# Altium PCB 驱动1.PcbDoc (part 2 of 2)
Units mil, origin at the board's own origin, x right, y up, seen from the top; angles counter-clockwise.
Board outline 2623.25 x 1935.03 mil, 2 copper layers (Top Layer, Bottom Layer); 38 components, 27 nets, 123 pads, 99 vias.
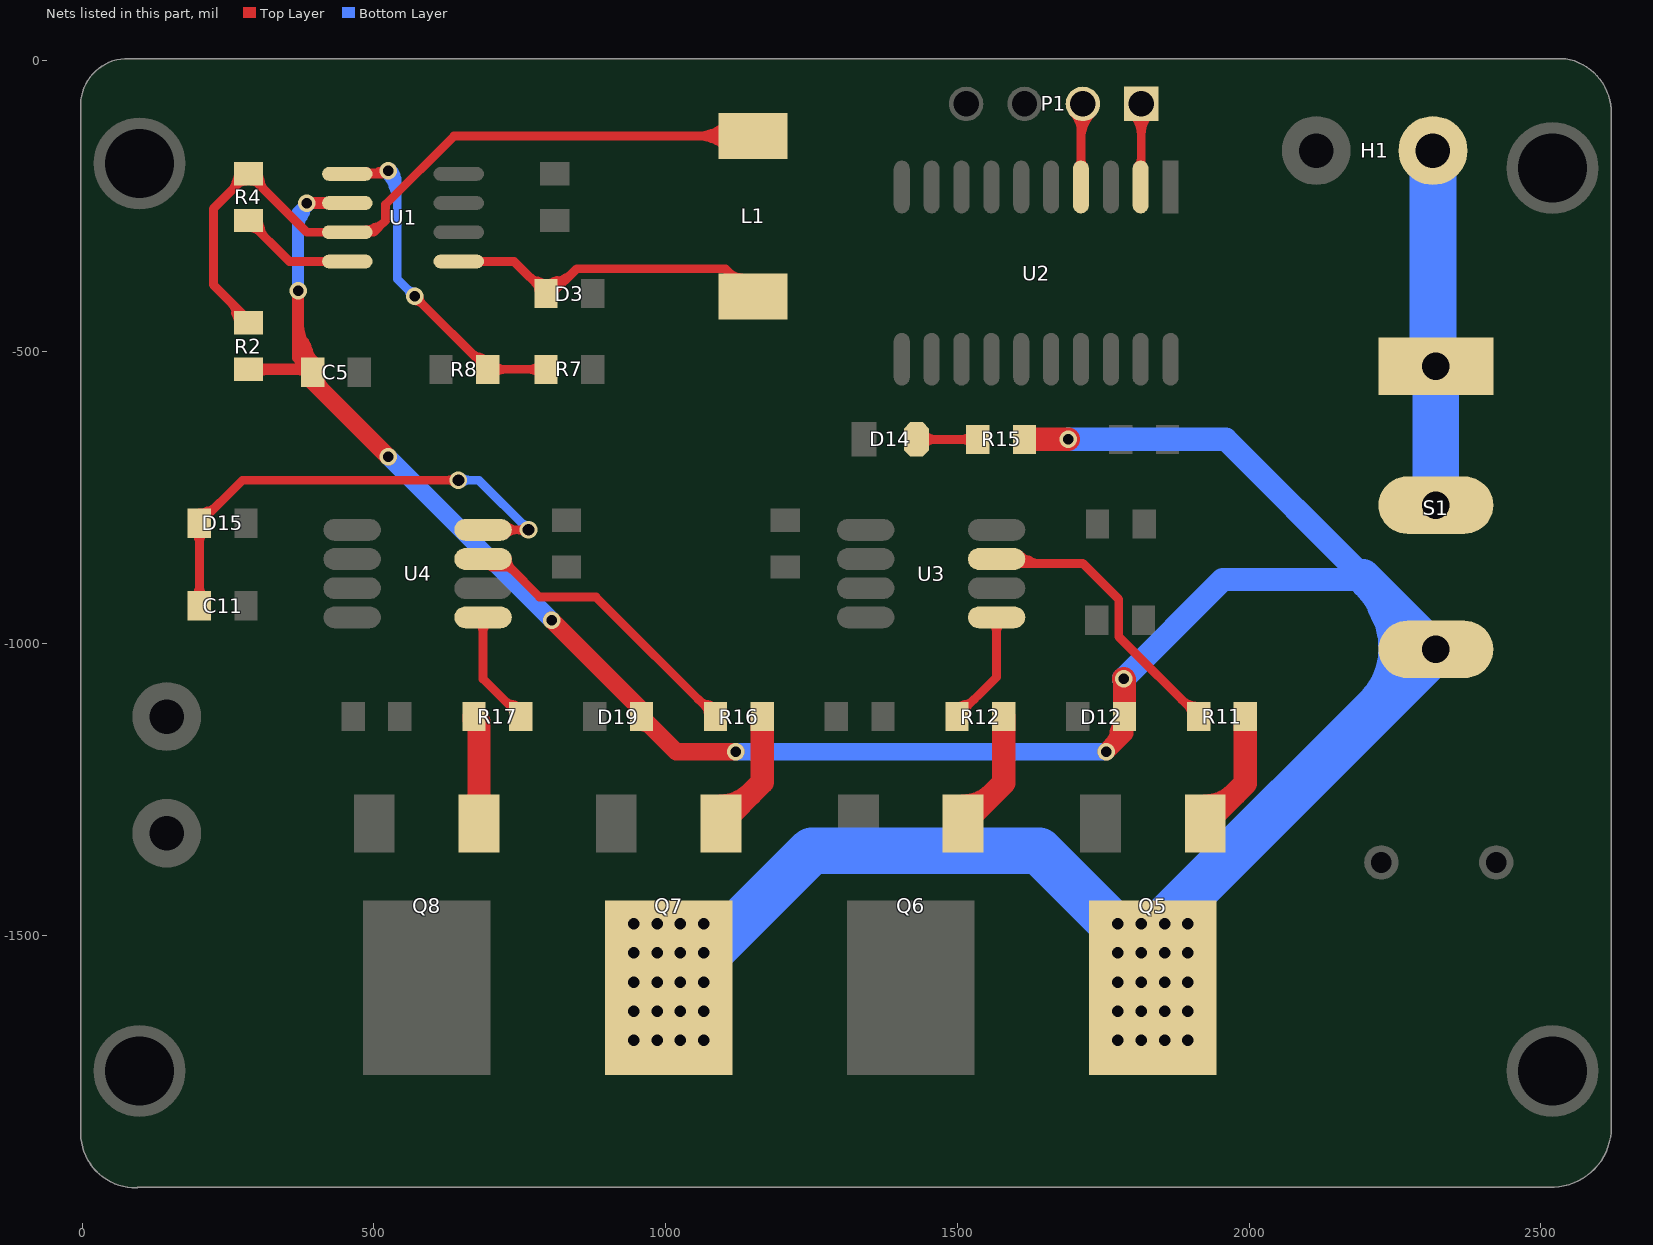
[diagram p2: the nets of this part, all layers, seen from the top]

## Via types
v1: diameter 31.5, hole 19.68, Top Layer to Bottom Layer, 80 vias
v2: diameter 30, hole 18, Top Layer to Bottom Layer, 17 vias
v3: diameter 30, hole 20, Top Layer to Bottom Layer, 2 vias

## Nets (pads, with @x,y where several pads share a name; then routed paths per layer and width w, separated by ;. In a path a pad name is that pad's centre, name@x,y a point inside that pad or via, vN(x,y) a via of type N, cw(c..) or ccw(c..) an arc to the next point about the centre after c; other vN are vias at no path point) (continued)
NetC11_1: C11.1 D15.1 U4.8 | length 1824.4
  Top Layer w15: C11.1@200.99,-935 D15.1@200.99,-793.8 274.79,-720 v3(645,-720) ; U4.8@687.2,-805 v3(765,-805) ; C11.1@192.15,-921.16 ccw(c170.81,-899.82) 200.99,-899.82 ; C11.1@192.15,-921.16 ccw(c170.81,-899.82) 200.99,-899.82 ; C11.1@192.15,-921.16 ccw(c170.81,-899.82) 200.99,-899.82 ; D15.1@192.15,-807.64 cw(c170.81,-828.98) 200.99,-828.98 ; D15.1@192.15,-807.64 cw(c170.81,-828.98) 200.99,-828.98 ; D15.1@192.15,-807.64 cw(c170.81,-828.98) 200.99,-828.98 ; D15.1@198.62,-788 cw(c221.41,-795.75) D15.1@215.18,-772.5 ; D15.1@198.62,-788 cw(c221.41,-795.75) D15.1@215.18,-772.5 ; D15.1@198.62,-788 cw(c221.41,-795.75) D15.1@215.18,-772.5 ; D15.1@198.62,-788 cw(c221.41,-795.75) D15.1@215.18,-772.5 ; 200.99,-899.82 ccw(c231.17,-899.82) C11.1@209.83,-921.16 ; 200.99,-899.82 ccw(c231.17,-899.82) C11.1@209.83,-921.16 ; 200.99,-899.82 ccw(c231.17,-899.82) C11.1@209.83,-921.16 ; 200.99,-828.98 cw(c231.17,-828.98) D15.1@209.83,-807.64 ; 200.99,-828.98 cw(c231.17,-828.98) D15.1@209.83,-807.64 ; 200.99,-828.98 cw(c231.17,-828.98) D15.1@209.83,-807.64 ; D15.1@200.99,-776.3 ccw(c200.99,-734.05) 230.86,-763.93 ; D15.1@200.99,-776.3 ccw(c200.99,-734.05) 230.86,-763.93 ; D15.1@200.99,-776.3 ccw(c200.99,-734.05) 230.86,-763.93 ; D15.1@213.49,-788.8 cw(c231.6,-788.8) D15.1@218.79,-776 ; D15.1@213.49,-788.8 cw(c231.6,-788.8) D15.1@218.79,-776 ; D15.1@213.49,-788.8 cw(c231.6,-788.8) D15.1@218.79,-776 ; 626.89,-720 cw(c626.89,-738.11) v3@639.7,-725.3 ; 626.89,-720 ccw(c626.89,-701.89) v3@639.7,-714.7 ; 626.89,-720 cw(c626.89,-738.11) v3@639.7,-725.3 ; 626.89,-720 ccw(c626.89,-701.89) v3@639.7,-714.7 ; 626.89,-720 cw(c626.89,-738.11) v3@639.7,-725.3 ; 626.89,-720 ccw(c626.89,-701.89) v3@639.7,-714.7 ; U4.8@725.64,-812.92 cw(c744.76,-832.04) 744.76,-805 ; U4.8@725.64,-812.92 cw(c744.76,-832.04) 744.76,-805 ; U4.8@725.64,-812.92 cw(c744.76,-832.04) 744.76,-805 ; U4.8@725.64,-797.08 ccw(c744.76,-777.96) 744.76,-805 ; U4.8@725.64,-797.08 ccw(c744.76,-777.96) 744.76,-805 ; U4.8@725.64,-797.08 ccw(c744.76,-777.96) 744.76,-805 ; 746.89,-805 cw(c746.89,-823.11) 759.7,-810.3 ccw(c746.89,-823.11) 746.89,-805 ; 746.89,-805 ccw(c746.89,-786.89) v3@759.7,-799.7 ; 746.89,-805 ccw(c746.89,-786.89) v3@759.7,-799.7 ; 746.89,-805 ccw(c746.89,-786.89) v3@759.7,-799.7
  Bottom Layer w15: v3(645,-720) 680,-720 v3(765,-805) ; v3@650.3,-725.3 cw(c663.11,-738.11) 663.11,-720 ; v3@650.3,-725.3 cw(c663.11,-738.11) 663.11,-720 ; v3@650.3,-725.3 cw(c663.11,-738.11) 663.11,-720 ; v3@650.3,-714.7 ccw(c663.11,-701.89) 663.11,-720 ; v3@650.3,-714.7 ccw(c663.11,-701.89) 663.11,-720 ; v3@650.3,-714.7 ccw(c663.11,-701.89) 663.11,-720 ; 752.2,-792.2 cw(c739.39,-805) v3@757.5,-805 ; 752.2,-792.2 ccw(c765,-779.39) v3@765,-797.5 ; 752.2,-792.2 cw(c739.39,-805) v3@757.5,-805 ; 752.2,-792.2 ccw(c765,-779.39) v3@765,-797.5 ; 752.2,-792.2 cw(c739.39,-805) v3@757.5,-805 ; 752.2,-792.2 ccw(c765,-779.39) v3@765,-797.5
NetD3_2: D3.2 L1.2 U1.1 | length 1304.6
  Top Layer w15: U1.1@645.47,-345 740,-345 D3.2@795,-400 805.25,-400 847.75,-357.5 1102.5,-357.5 ; L1.2@1150,-405 1102.5,-357.5 ; 765.13,-370.13 ccw(c795,-340.25) D3.2@795,-382.5 ; 765.13,-370.13 ccw(c795,-340.25) D3.2@795,-382.5 ; 765.13,-370.13 ccw(c795,-340.25) D3.2@795,-382.5 ; D3.2@777.2,-382.2 cw(c764.39,-395) D3.2@782.5,-395 ; D3.2@777.2,-382.2 cw(c764.39,-395) D3.2@782.5,-395 ; D3.2@777.2,-382.2 cw(c764.39,-395) D3.2@782.5,-395 ; D3.2@780.81,-378.7 cw(c774.58,-401.95) D3.2@797.37,-394.19 ; D3.2@780.81,-378.7 cw(c774.58,-401.95) D3.2@797.37,-394.19 ; D3.2@780.81,-378.7 cw(c774.58,-401.95) D3.2@797.37,-394.19 ; D3.2@780.81,-378.7 cw(c774.58,-401.95) D3.2@797.37,-394.19 ; D3.2@792.83,-393.76 cw(c823,-410.94) D3.2@814.01,-377.41 ; D3.2@792.83,-393.76 cw(c823,-410.94) D3.2@814.01,-377.41 ; D3.2@792.83,-393.76 cw(c823,-410.94) D3.2@814.01,-377.41 ; D3.2@792.83,-393.76 cw(c823,-410.94) D3.2@814.01,-377.41 ; D3.2@795,-397.5 ccw(c795,-366.72) 816.77,-388.48 ; D3.2@795,-397.5 ccw(c795,-366.72) 816.77,-388.48 ; D3.2@795,-397.5 ccw(c795,-366.72) 816.77,-388.48 ; D3.2@795,-382.5 ccw(c795,-315.5) 842.37,-362.88 ; D3.2@795,-382.5 ccw(c795,-315.5) 842.37,-362.88 ; D3.2@795,-382.5 ccw(c795,-315.5) 842.37,-362.88 ; 1102.5,-357.5 cw(c1086.95,-373.05) L1.2@1104.66,-386.1 ; 1102.5,-357.5 cw(c1086.95,-373.05) L1.2@1104.66,-386.1 ; 1102.5,-357.5 cw(c1086.95,-373.05) L1.2@1104.66,-386.1 ; 1109.51,-364.51 ccw(c1130.32,-343.71) L1.2@1130.32,-373.13 ; 1109.51,-364.51 ccw(c1130.32,-343.71) L1.2@1130.32,-373.13 ; 1109.51,-364.51 ccw(c1130.32,-343.71) L1.2@1130.32,-373.13
NetD14_1: D14.1 R15.2 | length 711.5
  Top Layer w15: D14.1@1430,-650 R15.2@1535,-650 ; D14.1@1440.01,-660.01 cw(c1464.17,-684.17) 1464.17,-650 ; D14.1@1440.01,-660.01 cw(c1464.17,-684.17) 1464.17,-650 ; D14.1@1440.01,-660.01 cw(c1464.17,-684.17) 1464.17,-650 ; D14.1@1440.01,-660.01 cw(c1464.17,-684.17) 1464.17,-650 ; D14.1@1440.01,-660.01 cw(c1464.17,-684.17) 1464.17,-650 ; D14.1@1440.01,-660.01 cw(c1464.17,-684.17) 1464.17,-650 ; D14.1@1440.01,-639.99 ccw(c1464.17,-615.83) 1464.17,-650 ; D14.1@1440.01,-639.99 ccw(c1464.17,-615.83) 1464.17,-650 ; D14.1@1440.01,-639.99 ccw(c1464.17,-615.83) 1464.17,-650 ; D14.1@1440.01,-639.99 ccw(c1464.17,-615.83) 1464.17,-650 ; D14.1@1440.01,-639.99 ccw(c1464.17,-615.83) 1464.17,-650 ; D14.1@1440.01,-639.99 ccw(c1464.17,-615.83) 1464.17,-650 ; 1504.82,-650 cw(c1504.82,-680.18) R15.2@1526.16,-658.84 ; 1504.82,-650 cw(c1504.82,-680.18) R15.2@1526.16,-658.84 ; 1504.82,-650 cw(c1504.82,-680.18) R15.2@1526.16,-658.84 ; 1504.82,-650 cw(c1504.82,-680.18) R15.2@1526.16,-658.84 ; 1504.82,-650 cw(c1504.82,-680.18) R15.2@1526.16,-658.84 ; 1504.82,-650 cw(c1504.82,-680.18) R15.2@1526.16,-658.84 ; 1504.82,-650 ccw(c1504.82,-619.82) R15.2@1526.16,-641.16 ; 1504.82,-650 ccw(c1504.82,-619.82) R15.2@1526.16,-641.16 ; 1504.82,-650 ccw(c1504.82,-619.82) R15.2@1526.16,-641.16 ; 1504.82,-650 ccw(c1504.82,-619.82) R15.2@1526.16,-641.16 ; 1504.82,-650 ccw(c1504.82,-619.82) R15.2@1526.16,-641.16 ; 1504.82,-650 ccw(c1504.82,-619.82) R15.2@1526.16,-641.16
NetH1_2: H1.2 S1.1 S1.2 | length 609.8
  Bottom Layer w80: H1.2@2315,-155 2315,-520 S1.1@2320,-525 S1.2@2320,-762.76
NetL1_1: L1.1 R2.1 R4.2 U1.7 | length 2784
  Top Layer w15: R2.1@285,-450 285,-445 225,-385 225,-255 R4.2@285,-195 385,-295 U1.7@454.53,-295 500,-295 520,-275 520,-247.52 637.52,-130 L1.1@1150,-130 ; 251.59,-411.59 cw(c213.18,-450) R2.1@267.5,-450 ; 251.59,-411.59 cw(c213.18,-450) R2.1@267.5,-450 ; 251.59,-411.59 cw(c213.18,-450) R2.1@267.5,-450 ; 255.13,-224.87 ccw(c225.25,-195) R4.2@267.5,-195 ; 255.13,-224.87 ccw(c225.25,-195) R4.2@267.5,-195 ; 255.13,-224.87 ccw(c225.25,-195) R4.2@267.5,-195 ; R2.1@263.07,-433.46 ccw(c291.02,-425.97) R2.1@278.96,-452.27 ; R2.1@263.07,-433.46 ccw(c291.02,-425.97) R2.1@278.96,-452.27 ; R2.1@263.07,-433.46 ccw(c291.02,-425.97) R2.1@278.96,-452.27 ; R2.1@263.07,-433.46 ccw(c291.02,-425.97) R2.1@278.96,-452.27 ; R4.2@263.7,-209.19 cw(c286.95,-215.42) R4.2@279.19,-192.63 ; R4.2@263.7,-209.19 cw(c286.95,-215.42) R4.2@279.19,-192.63 ; R4.2@263.7,-209.19 cw(c286.95,-215.42) R4.2@279.19,-192.63 ; R4.2@263.7,-209.19 cw(c286.95,-215.42) R4.2@279.19,-192.63 ; R4.2@267.2,-212.8 cw(c280,-225.61) R4.2@280,-207.5 ; R4.2@267.2,-212.8 cw(c280,-225.61) R4.2@280,-207.5 ; R4.2@267.2,-212.8 cw(c280,-225.61) R4.2@280,-207.5 ; R4.2@290,-207.5 cw(c290,-225.61) R4.2@302.8,-212.8 ; R4.2@290,-207.5 cw(c290,-225.61) R4.2@302.8,-212.8 ; R4.2@290,-207.5 cw(c290,-225.61) R4.2@302.8,-212.8 ; R4.2@290.81,-192.63 cw(c283.05,-215.42) R4.2@306.3,-209.19 ; R4.2@290.81,-192.63 cw(c283.05,-215.42) R4.2@306.3,-209.19 ; R4.2@290.81,-192.63 cw(c283.05,-215.42) R4.2@306.3,-209.19 ; R4.2@290.81,-192.63 cw(c283.05,-215.42) R4.2@306.3,-209.19 ; R4.2@302.5,-195 ccw(c344.75,-195) 314.87,-224.87 ; R4.2@302.5,-195 ccw(c344.75,-195) 314.87,-224.87 ; R4.2@302.5,-195 ccw(c344.75,-195) 314.87,-224.87 ; U1.7@486.02,-290.69 ccw(c486.02,-246.54) 517.24,-277.76 ; U1.7@486.02,-290.69 ccw(c486.02,-246.54) 517.24,-277.76 ; U1.7@486.02,-290.69 ccw(c486.02,-246.54) 517.24,-277.76 ; U1.7@487.35,-290.9 ccw(c490.81,-280.18) 498.77,-288.14 ; U1.7@487.35,-290.9 ccw(c490.81,-280.18) 498.77,-288.14 ; U1.7@487.35,-290.9 ccw(c490.81,-280.18) 498.77,-288.14 ; U1.7@487.35,-290.9 ccw(c490.81,-280.18) 498.77,-288.14 ; U1.7@489.76,-297.16 cw(c511.08,-309.47) 504.71,-285.68 ; U1.7@489.76,-297.16 cw(c511.08,-309.47) 504.71,-285.68 ; U1.7@489.76,-297.16 cw(c511.08,-309.47) 504.71,-285.68 ; U1.7@489.76,-297.16 cw(c511.08,-309.47) 504.71,-285.68 ; 1053.37,-130 ccw(c1053.37,-53.06) L1.1@1107.78,-107.46 ; 1053.37,-130 ccw(c1053.37,-53.06) L1.1@1107.78,-107.46 ; 1053.37,-130 ccw(c1053.37,-53.06) L1.1@1107.78,-107.46 ; 1053.37,-130 cw(c1053.37,-206.94) L1.1@1107.78,-152.54 ; 1053.37,-130 cw(c1053.37,-206.94) L1.1@1107.78,-152.54 ; 1053.37,-130 cw(c1053.37,-206.94) L1.1@1107.78,-152.54 ; 1089.59,-130 cw(c1089.59,-170.73) L1.1@1118.39,-141.93 ; 1089.59,-130 ccw(c1089.59,-89.27) L1.1@1118.39,-118.07 ; 1089.59,-130 cw(c1089.59,-170.73) L1.1@1118.39,-141.93 ; 1089.59,-130 ccw(c1089.59,-89.27) L1.1@1118.39,-118.07 ; 1089.59,-130 cw(c1089.59,-170.73) L1.1@1118.39,-141.93 ; 1089.59,-130 ccw(c1089.59,-89.27) L1.1@1118.39,-118.07
NetP1_1: P1.1 U2.2 | length 436
  Top Layer w15: U2.2@1814.13,-217.36 1815,-216.5 P1.1@1815,-75 ; P1.1@1799.42,-90.58 cw(c1761.82,-128.18) 1815,-128.18 ; P1.1@1799.42,-90.58 cw(c1761.82,-128.18) 1815,-128.18 ; P1.1@1799.42,-90.58 cw(c1761.82,-128.18) 1815,-128.18 ; U2.2@1809.69,-181.43 ccw(c1796.88,-168.62) 1815,-168.62 ; U2.2@1809.69,-181.43 ccw(c1796.88,-168.62) 1815,-168.62 ; U2.2@1809.69,-181.43 ccw(c1796.88,-168.62) 1815,-168.62 ; 1815,-128.18 cw(c1868.18,-128.18) P1.1@1830.58,-90.58 ; 1815,-128.18 cw(c1868.18,-128.18) P1.1@1830.58,-90.58 ; 1815,-128.18 cw(c1868.18,-128.18) P1.1@1830.58,-90.58
NetP1_2: P1.2 U2.4 | length 465.7
  Top Layer w15: U2.4@1711.77,-217.36 1711.77,-78.23 P1.2@1715,-75 ; P1.2@1699.42,-90.58 cw(c1669.61,-120.39) 1711.77,-120.39 ; P1.2@1699.42,-90.58 cw(c1669.61,-120.39) 1711.77,-120.39 ; P1.2@1699.42,-90.58 cw(c1669.61,-120.39) 1711.77,-120.39 ; U2.4@1707.33,-181.43 ccw(c1696.61,-170.71) 1711.77,-170.71 ; U2.4@1707.33,-181.43 ccw(c1696.61,-170.71) 1711.77,-170.71 ; U2.4@1707.33,-181.43 ccw(c1696.61,-170.71) 1711.77,-170.71 ; 1711.77,-170.71 ccw(c1726.93,-170.71) U2.4@1716.21,-181.43 ; 1711.77,-170.71 ccw(c1726.93,-170.71) U2.4@1716.21,-181.43 ; 1711.77,-170.71 ccw(c1726.93,-170.71) U2.4@1716.21,-181.43 ; 1711.77,-135.97 cw(c1775.97,-135.97) P1.2@1730.58,-90.58 ; 1711.77,-135.97 cw(c1775.97,-135.97) P1.2@1730.58,-90.58 ; 1711.77,-135.97 cw(c1775.97,-135.97) P1.2@1730.58,-90.58
NetQ5_1: Q5.1 R11.2 | length 382.3
  Top Layer w40: Q5.1@1924.76,-1308.27 1993.34,-1239.69 R11.2@1993.34,-1125 ; Q5.1@1924.76,-1278.27 ccw(c1924.76,-1205.84) 1975.98,-1257.05 ; Q5.1@1924.76,-1278.27 ccw(c1924.76,-1205.84) 1975.98,-1257.05 ; Q5.1@1924.76,-1278.27 ccw(c1924.76,-1205.84) 1975.98,-1257.05
NetQ6_1: Q6.1 R12.2 | length 382.7
  Top Layer w40: Q6.1@1509.89,-1308.27 1579.43,-1238.73 R12.2@1579.43,-1125 ; Q6.1@1509.89,-1278.27 ccw(c1509.89,-1205.84) 1561.1,-1257.05 ; Q6.1@1509.89,-1278.27 ccw(c1509.89,-1205.84) 1561.1,-1257.05 ; Q6.1@1509.89,-1278.27 ccw(c1509.89,-1205.84) 1561.1,-1257.05
NetQ7_1: Q7.1 R16.2 | length 383.1
  Top Layer w40: Q7.1@1095.01,-1308.27 1165.51,-1237.77 R16.2@1165.51,-1125 ; Q7.1@1095.01,-1278.27 ccw(c1095.01,-1205.84) 1146.22,-1257.05 ; Q7.1@1095.01,-1278.27 ccw(c1095.01,-1205.84) 1146.22,-1257.05 ; Q7.1@1095.01,-1278.27 ccw(c1095.01,-1205.84) 1146.22,-1257.05
NetQ8_1: Q8.1 R17.2 | length 426.2
  Top Layer w40: R17.2@671.59,-1125 680.13,-1133.54 Q8.1@680.13,-1308.27 ; Q8.1@669.53,-1282.66 ccw(c643.92,-1257.05) 680.13,-1257.05 ; Q8.1@669.53,-1282.66 ccw(c643.92,-1257.05) 680.13,-1257.05 ; Q8.1@669.53,-1282.66 ccw(c643.92,-1257.05) 680.13,-1257.05 ; R17.2@671.59,-1130 cw(c650.97,-1150.62) 680.13,-1150.62 ; R17.2@671.59,-1130 cw(c650.97,-1150.62) 680.13,-1150.62 ; R17.2@671.59,-1130 cw(c650.97,-1150.62) 680.13,-1150.62 ; 680.13,-1257.05 ccw(c716.35,-1257.05) Q8.1@690.74,-1282.66 ; 680.13,-1257.05 ccw(c716.35,-1257.05) Q8.1@690.74,-1282.66 ; 680.13,-1257.05 ccw(c716.35,-1257.05) Q8.1@690.74,-1282.66
NetR4_1: R4.1 U1.8 | length 435.2
  Top Layer w15: R4.1@285,-275 355,-345 U1.8@454.53,-345 ; R4.1@290,-287.5 cw(c290,-305.61) R4.1@302.8,-292.8 ; R4.1@290,-287.5 cw(c290,-305.61) R4.1@302.8,-292.8 ; R4.1@290,-287.5 cw(c290,-305.61) R4.1@302.8,-292.8 ; R4.1@290.81,-272.63 cw(c283.05,-295.42) R4.1@306.3,-289.19 ; R4.1@290.81,-272.63 cw(c283.05,-295.42) R4.1@306.3,-289.19 ; R4.1@290.81,-272.63 cw(c283.05,-295.42) R4.1@306.3,-289.19 ; R4.1@290.81,-272.63 cw(c283.05,-295.42) R4.1@306.3,-289.19 ; R4.1@302.5,-275 ccw(c344.75,-275) 314.87,-304.87 ; R4.1@302.5,-275 ccw(c344.75,-275) 314.87,-304.87 ; R4.1@302.5,-275 ccw(c344.75,-275) 314.87,-304.87
NetR7_2: R7.2 R8.2 U1.5 | length 1875.9
  Top Layer w15: U1.5@454.53,-195 520,-195 v2(525,-190) ; v2(570,-405) R8.2@695,-530 R7.2@795,-530 ; U1.5@488.18,-191.27 ccw(c497.27,-175.52) 501.98,-193.08 ; U1.5@488.18,-191.27 ccw(c497.27,-175.52) 501.98,-193.08 ; U1.5@488.18,-191.27 ccw(c497.27,-175.52) 501.98,-193.08 ; U1.5@488.18,-191.27 ccw(c497.27,-175.52) 501.98,-193.08 ; U1.5@494.82,-195 ccw(c494.82,-159.82) v2@519.7,-184.7 ; U1.5@494.82,-195 ccw(c494.82,-159.82) v2@519.7,-184.7 ; U1.5@494.82,-195 ccw(c494.82,-159.82) v2@519.7,-184.7 ; 507.55,-191.71 cw(c511.81,-199.09) v2@518.82,-194.25 ; 507.55,-191.71 cw(c511.81,-199.09) v2@518.82,-194.25 ; 507.55,-191.71 cw(c511.81,-199.09) v2@518.82,-194.25 ; 507.55,-191.71 cw(c511.81,-199.09) v2@518.82,-194.25 ; v2@570,-412.5 cw(c570,-430.61) 582.8,-417.8 ; v2@570,-412.5 cw(c570,-430.61) 582.8,-417.8 ; v2@570,-412.5 cw(c570,-430.61) 582.8,-417.8 ; v2@577.5,-405 ccw(c595.61,-405) 582.8,-417.8 ; v2@577.5,-405 ccw(c595.61,-405) 582.8,-417.8 ; v2@577.5,-405 ccw(c595.61,-405) 582.8,-417.8 ; 665.13,-500.13 ccw(c695,-470.25) R8.2@695,-512.5 ; 665.13,-500.13 ccw(c695,-470.25) R8.2@695,-512.5 ; 665.13,-500.13 ccw(c695,-470.25) R8.2@695,-512.5 ; R8.2@677.2,-512.2 cw(c664.39,-525) R8.2@682.5,-525 ; R8.2@677.2,-512.2 cw(c664.39,-525) R8.2@682.5,-525 ; R8.2@677.2,-512.2 cw(c664.39,-525) R8.2@682.5,-525 ; R8.2@677.2,-512.2 cw(c664.39,-525) R8.2@682.5,-525 ; R8.2@677.2,-512.2 cw(c664.39,-525) R8.2@682.5,-525 ; R8.2@677.2,-512.2 cw(c664.39,-525) R8.2@682.5,-525 ; R8.2@680.81,-508.7 cw(c674.58,-531.95) R8.2@697.37,-524.19 ; R8.2@680.81,-508.7 cw(c674.58,-531.95) R8.2@697.37,-524.19 ; R8.2@680.81,-508.7 cw(c674.58,-531.95) R8.2@697.37,-524.19 ; R8.2@680.81,-508.7 cw(c674.58,-531.95) R8.2@697.37,-524.19 ; R8.2@703.84,-538.84 cw(c725.18,-560.18) 725.18,-530 ; R8.2@703.84,-538.84 cw(c725.18,-560.18) 725.18,-530 ; R8.2@703.84,-538.84 cw(c725.18,-560.18) 725.18,-530 ; R8.2@703.84,-521.16 ccw(c725.18,-499.82) 725.18,-530 ; R8.2@703.84,-521.16 ccw(c725.18,-499.82) 725.18,-530 ; R8.2@703.84,-521.16 ccw(c725.18,-499.82) 725.18,-530 ; 764.82,-530 cw(c764.82,-560.18) R7.2@786.16,-538.84 ; 764.82,-530 ccw(c764.82,-499.82) R7.2@786.16,-521.16 ; 764.82,-530 cw(c764.82,-560.18) R7.2@786.16,-538.84 ; 764.82,-530 ccw(c764.82,-499.82) R7.2@786.16,-521.16 ; 764.82,-530 cw(c764.82,-560.18) R7.2@786.16,-538.84 ; 764.82,-530 ccw(c764.82,-499.82) R7.2@786.16,-521.16
  Bottom Layer w15: v2(525,-190) 540,-205 540,-375 v2(570,-405) ; v2@519.7,-195.3 cw(c470.68,-244.32) 540,-244.32 ; v2@519.7,-195.3 cw(c470.68,-244.32) 540,-244.32 ; v2@519.7,-195.3 cw(c470.68,-244.32) 540,-244.32 ; v2@530.3,-184.7 cw(c506.89,-208.11) 540,-208.11 ; v2@530.3,-184.7 cw(c506.89,-208.11) 540,-208.11 ; v2@530.3,-184.7 cw(c506.89,-208.11) 540,-208.11 ; v2@532.16,-192.23 ccw(c568.67,-203.63) 535.55,-222.75 ; v2@532.16,-192.23 ccw(c568.67,-203.63) 535.55,-222.75 ; v2@532.16,-192.23 ccw(c568.67,-203.63) 535.55,-222.75 ; v2@532.16,-192.23 ccw(c568.67,-203.63) 535.55,-222.75 ; 557.2,-392.2 cw(c544.39,-405) v2@562.5,-405 ; 557.2,-392.2 ccw(c570,-379.39) v2@570,-397.5 ; 557.2,-392.2 cw(c544.39,-405) v2@562.5,-405 ; 557.2,-392.2 ccw(c570,-379.39) v2@570,-397.5 ; 557.2,-392.2 cw(c544.39,-405) v2@562.5,-405 ; 557.2,-392.2 ccw(c570,-379.39) v2@570,-397.5
NetR11_1: R11.1 U3.7 | length 1171.3
  Top Layer w15: U3.7@1567.2,-855 1574.7,-862.5 1715,-862.5 1776.51,-924.01 1776.51,-988.17 R11.1@1913.34,-1125 ; U3.7@1605.64,-847.08 ccw(c1642.86,-809.85) 1642.86,-862.5 ; U3.7@1605.64,-847.08 ccw(c1642.86,-809.85) 1642.86,-862.5 ; U3.7@1605.64,-847.08 ccw(c1642.86,-809.85) 1642.86,-862.5 ; U3.7@1605.64,-847.08 ccw(c1642.86,-809.85) 1642.86,-862.5 ; U3.7@1605.64,-847.08 ccw(c1642.86,-809.85) 1642.86,-862.5 ; U3.7@1605.64,-847.08 ccw(c1642.86,-809.85) 1642.86,-862.5 ; U3.7@1606.92,-861.38 cw(c1617.43,-868.65) 1623.83,-857.58 ; U3.7@1606.92,-861.38 cw(c1617.43,-868.65) 1623.83,-857.58 ; U3.7@1606.92,-861.38 cw(c1617.43,-868.65) 1623.83,-857.58 ; U3.7@1606.92,-861.38 cw(c1617.43,-868.65) 1623.83,-857.58 ; U3.7@1606.92,-861.38 cw(c1617.43,-868.65) 1623.83,-857.58 ; U3.7@1606.92,-861.38 cw(c1617.43,-868.65) 1623.83,-857.58 ; U3.7@1606.92,-861.38 cw(c1617.43,-868.65) 1623.83,-857.58 ; U3.7@1606.92,-861.38 cw(c1617.43,-868.65) 1623.83,-857.58 ; U3.7@1606.92,-861.38 cw(c1617.43,-868.65) 1623.83,-857.58 ; U3.7@1606.92,-861.38 cw(c1617.43,-868.65) 1623.83,-857.58 ; U3.7@1606.92,-861.38 cw(c1617.43,-868.65) 1623.83,-857.58 ; U3.7@1606.92,-861.38 cw(c1617.43,-868.65) 1623.83,-857.58 ; U3.7@1606.92,-861.38 cw(c1617.43,-868.65) 1623.83,-857.58 ; U3.7@1606.92,-861.38 cw(c1617.43,-868.65) 1623.83,-857.58 ; U3.7@1606.92,-861.38 cw(c1617.43,-868.65) 1623.83,-857.58 ; 1883.47,-1095.13 ccw(c1913.34,-1065.25) R11.1@1913.34,-1107.5 ; 1883.47,-1095.13 ccw(c1913.34,-1065.25) R11.1@1913.34,-1107.5 ; 1883.47,-1095.13 ccw(c1913.34,-1065.25) R11.1@1913.34,-1107.5 ; R11.1@1895.54,-1107.2 cw(c1882.74,-1120) R11.1@1900.84,-1120 ; R11.1@1895.54,-1107.2 cw(c1882.74,-1120) R11.1@1900.84,-1120 ; R11.1@1895.54,-1107.2 cw(c1882.74,-1120) R11.1@1900.84,-1120
NetR12_1: R12.1 U3.5 | length 562.2
  Top Layer w15: R12.1@1499.43,-1125 1567.2,-1057.22 U3.5@1567.2,-955 ; R12.1@1497.06,-1119.19 cw(c1519.85,-1126.95) R12.1@1513.62,-1103.7 ; R12.1@1497.06,-1119.19 cw(c1519.85,-1126.95) R12.1@1513.62,-1103.7 ; R12.1@1497.06,-1119.19 cw(c1519.85,-1126.95) R12.1@1513.62,-1103.7 ; R12.1@1497.06,-1119.19 cw(c1519.85,-1126.95) R12.1@1513.62,-1103.7 ; R12.1@1499.43,-1107.5 ccw(c1499.43,-1065.25) 1529.3,-1095.13 ; R12.1@1499.43,-1107.5 ccw(c1499.43,-1065.25) 1529.3,-1095.13 ; R12.1@1499.43,-1107.5 ccw(c1499.43,-1065.25) 1529.3,-1095.13 ; R12.1@1511.93,-1120 cw(c1530.03,-1120) R12.1@1517.23,-1107.2 ; R12.1@1511.93,-1120 cw(c1530.03,-1120) R12.1@1517.23,-1107.2 ; R12.1@1511.93,-1120 cw(c1530.03,-1120) R12.1@1517.23,-1107.2 ; U3.5@1559.28,-962.92 cw(c1540.16,-982.04) 1567.2,-982.04 ; U3.5@1559.28,-962.92 cw(c1540.16,-982.04) 1567.2,-982.04 ; U3.5@1559.28,-962.92 cw(c1540.16,-982.04) 1567.2,-982.04 ; 1567.2,-982.04 cw(c1594.25,-982.04) U3.5@1575.12,-962.92 ; 1567.2,-982.04 cw(c1594.25,-982.04) U3.5@1575.12,-962.92 ; 1567.2,-982.04 cw(c1594.25,-982.04) U3.5@1575.12,-962.92
NetR16_1: R16.1 U4.7 | length 1427.5
  Top Layer w15: U4.7@687.2,-855 701,-868.8 732.71,-868.8 ; R16.1@1085.51,-1125 880.51,-920 783.91,-920 732.71,-868.8 ; U4.7@717.72,-866.2 cw(c717.72,-896.13) 738.88,-874.97 ; U4.7@717.72,-866.2 cw(c717.72,-896.13) 738.88,-874.97 ; U4.7@717.72,-866.2 cw(c717.72,-896.13) 738.88,-874.97 ; U4.7@717.72,-866.2 cw(c717.72,-896.13) 738.88,-874.97 ; U4.7@717.72,-866.2 cw(c717.72,-896.13) 738.88,-874.97 ; U4.7@717.72,-866.2 cw(c717.72,-896.13) 738.88,-874.97 ; U4.7@720.85,-865.75 cw(c724.21,-877.3) 732.71,-868.8 ; U4.7@720.85,-865.75 cw(c724.21,-877.3) 732.71,-868.8 ; U4.7@720.85,-865.75 cw(c724.21,-877.3) 732.71,-868.8 ; U4.7@720.85,-865.75 cw(c724.21,-877.3) 732.71,-868.8 ; U4.7@720.85,-865.75 cw(c724.21,-877.3) 732.71,-868.8 ; U4.7@720.85,-865.75 cw(c724.21,-877.3) 732.71,-868.8 ; U4.7@728.78,-856.74 ccw(c742.6,-858.91) 732.71,-868.8 ; U4.7@728.78,-856.74 ccw(c742.6,-858.91) 732.71,-868.8 ; U4.7@728.78,-856.74 ccw(c742.6,-858.91) 732.71,-868.8 ; U4.7@728.78,-856.74 ccw(c742.6,-858.91) 732.71,-868.8 ; U4.7@728.78,-856.74 ccw(c742.6,-858.91) 732.71,-868.8 ; U4.7@728.78,-856.74 ccw(c742.6,-858.91) 732.71,-868.8 ; U4.7@728.92,-855 ccw(c753.07,-855) 735.99,-872.08 ; U4.7@728.92,-855 ccw(c753.07,-855) 735.99,-872.08 ; U4.7@728.92,-855 ccw(c753.07,-855) 735.99,-872.08 ; U4.7@728.92,-855 ccw(c753.07,-855) 735.99,-872.08 ; U4.7@728.92,-855 ccw(c753.07,-855) 735.99,-872.08 ; U4.7@728.92,-855 ccw(c753.07,-855) 735.99,-872.08 ; 1055.64,-1095.13 ccw(c1085.51,-1065.25) R16.1@1085.51,-1107.5 ; 1055.64,-1095.13 ccw(c1085.51,-1065.25) R16.1@1085.51,-1107.5 ; 1055.64,-1095.13 ccw(c1085.51,-1065.25) R16.1@1085.51,-1107.5 ; 1055.64,-1095.13 ccw(c1085.51,-1065.25) R16.1@1085.51,-1107.5 ; 1055.64,-1095.13 ccw(c1085.51,-1065.25) R16.1@1085.51,-1107.5 ; 1055.64,-1095.13 ccw(c1085.51,-1065.25) R16.1@1085.51,-1107.5 ; R16.1@1067.71,-1107.2 cw(c1054.9,-1120) R16.1@1073.01,-1120 ; R16.1@1067.71,-1107.2 cw(c1054.9,-1120) R16.1@1073.01,-1120 ; R16.1@1067.71,-1107.2 cw(c1054.9,-1120) R16.1@1073.01,-1120 ; R16.1@1067.71,-1107.2 cw(c1054.9,-1120) R16.1@1073.01,-1120 ; R16.1@1067.71,-1107.2 cw(c1054.9,-1120) R16.1@1073.01,-1120 ; R16.1@1071.32,-1103.7 cw(c1065.09,-1126.95) R16.1@1087.88,-1119.19 ; R16.1@1071.32,-1103.7 cw(c1065.09,-1126.95) R16.1@1087.88,-1119.19 ; R16.1@1071.32,-1103.7 cw(c1065.09,-1126.95) R16.1@1087.88,-1119.19 ; R16.1@1071.32,-1103.7 cw(c1065.09,-1126.95) R16.1@1087.88,-1119.19 ; R16.1@1071.32,-1103.7 cw(c1065.09,-1126.95) R16.1@1087.88,-1119.19 ; R16.1@1071.32,-1103.7 cw(c1065.09,-1126.95) R16.1@1087.88,-1119.19 ; R16.1@1071.32,-1103.7 cw(c1065.09,-1126.95) R16.1@1087.88,-1119.19 ; R16.1@1071.32,-1103.7 cw(c1065.09,-1126.95) R16.1@1087.88,-1119.19 ; R16.1@1071.32,-1103.7 cw(c1065.09,-1126.95) R16.1@1087.88,-1119.19 ; R16.1@1071.32,-1103.7 cw(c1065.09,-1126.95) R16.1@1087.88,-1119.19
NetR17_1: R17.1 U4.5 | length 560.8
  Top Layer w15: U4.5@687.2,-955 687.2,-1060.61 R17.1@751.59,-1125 ; U4.5@679.28,-962.92 cw(c660.16,-982.04) 687.2,-982.04 ; U4.5@679.28,-962.92 cw(c660.16,-982.04) 687.2,-982.04 ; U4.5@679.28,-962.92 cw(c660.16,-982.04) 687.2,-982.04 ; 687.2,-982.04 cw(c714.25,-982.04) U4.5@695.12,-962.92 ; 687.2,-982.04 cw(c714.25,-982.04) U4.5@695.12,-962.92 ; 687.2,-982.04 cw(c714.25,-982.04) U4.5@695.12,-962.92 ; 721.72,-1095.13 ccw(c751.59,-1065.25) R17.1@751.59,-1107.5 ; 721.72,-1095.13 ccw(c751.59,-1065.25) R17.1@751.59,-1107.5 ; 721.72,-1095.13 ccw(c751.59,-1065.25) R17.1@751.59,-1107.5 ; R17.1@733.79,-1107.2 cw(c720.99,-1120) R17.1@739.09,-1120 ; R17.1@733.79,-1107.2 cw(c720.99,-1120) R17.1@739.09,-1120 ; R17.1@733.79,-1107.2 cw(c720.99,-1120) R17.1@739.09,-1120 ; R17.1@737.4,-1103.7 cw(c731.17,-1126.95) R17.1@753.96,-1119.19 ; R17.1@737.4,-1103.7 cw(c731.17,-1126.95) R17.1@753.96,-1119.19 ; R17.1@737.4,-1103.7 cw(c731.17,-1126.95) R17.1@753.96,-1119.19 ; R17.1@737.4,-1103.7 cw(c731.17,-1126.95) R17.1@753.96,-1119.19
VBAT: C5.1 D12.1 D19.1 Q5.2 Q7.2 R2.2 R15.1 S1.3 U1.6 | length 8743.5
  Top Layer w15: C5.1@390,-530 370,-510 ; C5.1@395,-550 C5.1@395,-535 ; D19.1@958.55,-1125 D19.1@958.55,-1113.55 ; 370,-510 ccw(c389.15,-490.85) C5.1@393.15,-517.64 ; 370,-510 ccw(c389.15,-490.85) C5.1@393.15,-517.64 ; 370,-510 ccw(c389.15,-490.85) C5.1@393.15,-517.64 ; 370,-510 ccw(c389.15,-490.85) C5.1@393.15,-517.64 ; 370,-510 ccw(c389.15,-490.85) C5.1@393.15,-517.64 ; 370,-510 ccw(c389.15,-490.85) C5.1@393.15,-517.64 ; C5.1@377.2,-517.2 cw(c364.39,-530) C5.1@382.5,-530 ; C5.1@377.2,-517.2 cw(c364.39,-530) C5.1@382.5,-530 ; C5.1@377.2,-517.2 cw(c364.39,-530) C5.1@382.5,-530
  Top Layer w20: R2.2@285,-530 C5.1@390,-530 ; 370,-510 v2(370,-395) ; v2(385,-245) U1.6@454.53,-245 ; R2.2@297.07,-537.07 cw(c314.14,-554.14) 314.14,-530 ; R2.2@297.07,-537.07 cw(c314.14,-554.14) 314.14,-530 ; R2.2@297.07,-537.07 cw(c314.14,-554.14) 314.14,-530 ; R2.2@297.07,-522.93 ccw(c314.14,-505.86) 314.14,-530 ; R2.2@297.07,-522.93 ccw(c314.14,-505.86) 314.14,-530 ; R2.2@297.07,-522.93 ccw(c314.14,-505.86) 314.14,-530 ; 369.3,-504.8 ccw(c395.63,-489.6) C5.1@395.16,-520 ; 369.3,-504.8 ccw(c395.63,-489.6) C5.1@395.16,-520 ; 369.3,-504.8 ccw(c395.63,-489.6) C5.1@395.16,-520 ; 369.3,-504.8 ccw(c395.63,-489.6) C5.1@395.16,-520 ; 370,-493.79 ccw(c431.21,-493.79) C5.1@387.93,-537.07 ; 370,-493.79 ccw(c431.21,-493.79) C5.1@387.93,-537.07 ; 370,-493.79 ccw(c431.21,-493.79) C5.1@387.93,-537.07 ; 370,-445.5 ccw(c479.5,-445.5) C5.1@402.07,-522.93 ; 370,-445.5 ccw(c479.5,-445.5) C5.1@402.07,-522.93 ; 370,-445.5 ccw(c479.5,-445.5) C5.1@402.07,-522.93 ; 370.86,-530 cw(c370.86,-554.14) C5.1@387.93,-537.07 ; 370.86,-530 ccw(c370.86,-505.86) C5.1@387.93,-522.93 ; 370.86,-530 cw(c370.86,-554.14) C5.1@387.93,-537.07 ; 370.86,-530 ccw(c370.86,-505.86) C5.1@387.93,-522.93 ; 370.86,-530 cw(c370.86,-554.14) C5.1@387.93,-537.07 ; 370.86,-530 ccw(c370.86,-505.86) C5.1@387.93,-522.93 ; 379.63,-484.07 cw(c330.17,-512.63) C5.1@385.34,-527.41 ; 379.63,-484.07 cw(c330.17,-512.63) C5.1@385.34,-527.41 ; 379.63,-484.07 cw(c330.17,-512.63) C5.1@385.34,-527.41 ; 379.63,-484.07 cw(c330.17,-512.63) C5.1@385.34,-527.41 ; 385.34,-497.85 ccw(c411.47,-497.85) C5.1@399.56,-521.1 ; 385.34,-497.85 ccw(c411.47,-497.85) C5.1@399.56,-521.1 ; 385.34,-497.85 ccw(c411.47,-497.85) C5.1@399.56,-521.1 ; 385.34,-497.85 ccw(c411.47,-497.85) C5.1@399.56,-521.1
  Top Layer w30: C5.1@395,-550 v2(525,-680) ; v2(805,-960) D19.1@958.55,-1113.55 ; D19.1@958.55,-1125 1018.55,-1185 v2(1120,-1185) ; v2(1755,-1185) 1786.39,-1153.61 D12.1@1786.39,-1125 ; C5.1@400,-540 ccw(c436.21,-540) 410.61,-565.61 ; C5.1@400,-540 ccw(c436.21,-540) 410.61,-565.61 ; C5.1@400,-540 ccw(c436.21,-540) 410.61,-565.61 ; C5.1@400,-540 ccw(c436.21,-540) 410.61,-565.61 ; C5.1@400,-540 ccw(c436.21,-540) 410.61,-565.61 ; C5.1@400,-540 ccw(c436.21,-540) 410.61,-565.61 ; D19.1@945.46,-1100.46 cw(c925.91,-1120) D19.1@953.55,-1120 ; D19.1@945.46,-1100.46 cw(c925.91,-1120) D19.1@953.55,-1120 ; D19.1@945.46,-1100.46 cw(c925.91,-1120) D19.1@953.55,-1120 ; D19.1@958.55,-1135 cw(c958.55,-1159.14) D19.1@975.62,-1142.07 ; D19.1@958.55,-1135 cw(c958.55,-1159.14) D19.1@975.62,-1142.07 ; D19.1@958.55,-1135 cw(c958.55,-1159.14) D19.1@975.62,-1142.07 ; v2@1761.15,-1178.85 ccw(c1712.3,-1130) D12.1@1781.39,-1130 ; v2@1761.15,-1178.85 ccw(c1712.3,-1130) D12.1@1781.39,-1130 ; v2@1761.15,-1178.85 ccw(c1712.3,-1130) D12.1@1781.39,-1130 ; 1775.58,-1151.67 cw(c1803.17,-1159.06) D12.1@1788.89,-1134.33 ; 1775.58,-1151.67 cw(c1803.17,-1159.06) D12.1@1788.89,-1134.33 ; 1775.58,-1151.67 cw(c1803.17,-1159.06) D12.1@1788.89,-1134.33 ; 1775.58,-1151.67 cw(c1803.17,-1159.06) D12.1@1788.89,-1134.33 ; 1775.58,-1151.67 cw(c1803.17,-1159.06) D12.1@1788.89,-1134.33 ; 1775.58,-1151.67 cw(c1803.17,-1159.06) D12.1@1788.89,-1134.33 ; 1775.58,-1151.67 cw(c1803.17,-1159.06) D12.1@1788.89,-1134.33 ; 1775.58,-1151.67 cw(c1803.17,-1159.06) D12.1@1788.89,-1134.33 ; 1775.58,-1151.67 cw(c1803.17,-1159.06) D12.1@1788.89,-1134.33
  Top Layer w40: R15.1@1615,-650 v2(1690,-650) ; v2(1785,-1060) 1786.39,-1061.39 D12.1@1786.39,-1125
  Bottom Layer w20: v2(370,-395) 370,-260 v2(385,-245) ; 370,-293.28 cw(c433.28,-293.28) v2@388.54,-248.54 ; 370,-293.28 cw(c433.28,-293.28) v2@388.54,-248.54 ; 370,-293.28 cw(c433.28,-293.28) v2@388.54,-248.54 ; 377.32,-267.97 ccw(c352.58,-253.69) v2@380.17,-246.29 ; 377.32,-267.97 ccw(c352.58,-253.69) v2@380.17,-246.29 ; 377.32,-267.97 ccw(c352.58,-253.69) v2@380.17,-246.29 ; 377.32,-267.97 ccw(c352.58,-253.69) v2@380.17,-246.29 ; 380.17,-261.79 cw(c394.42,-261.79) v2@387.45,-249.36 ; 380.17,-261.79 cw(c394.42,-261.79) v2@387.45,-249.36 ; 380.17,-261.79 cw(c394.42,-261.79) v2@387.45,-249.36 ; 380.17,-261.79 cw(c394.42,-261.79) v2@387.45,-249.36
  Bottom Layer w30: v2(525,-680) v2(805,-960) ; v2(1120,-1185) v2(1755,-1185)
  Bottom Layer w40: v2(1690,-650) 1960,-650 2195,-885 ; v2(1785,-1060) 1955,-890 2190,-890
  Bottom Layer w60: 2195,-885 S1.3@2320,-1010 ; 2203.19,-893.19 cw(c2086.38,-1010) S1.3@2251.57,-1010 ; 2203.19,-893.19 cw(c2086.38,-1010) S1.3@2251.57,-1010 ; 2203.19,-893.19 cw(c2086.38,-1010) S1.3@2251.57,-1010 ; 2229.26,-926.72 ccw(c2335.27,-898.32) S1.3@2280.39,-993.36 ; 2229.26,-926.72 ccw(c2335.27,-898.32) S1.3@2280.39,-993.36 ; 2229.26,-926.72 ccw(c2335.27,-898.32) S1.3@2280.39,-993.36 ; 2229.26,-926.72 ccw(c2335.27,-898.32) S1.3@2280.39,-993.36 ; 2240.23,-953.19 cw(c2204.73,-988.69) S1.3@2252.5,-1004.1 ; 2240.23,-953.19 cw(c2204.73,-988.69) S1.3@2252.5,-1004.1 ; 2240.23,-953.19 cw(c2204.73,-988.69) S1.3@2252.5,-1004.1 ; 2240.23,-953.19 cw(c2204.73,-988.69) S1.3@2252.5,-1004.1
  Bottom Layer w80: v1(1025.25,-1580) 1250.25,-1355 1640,-1355 v1(1815,-1530) ; v1@1815,-1515 S1.3@2320,-1010 ; 2220.26,-1109.74 ccw(c2120.52,-1010) S1.3@2261.57,-1010 ; 2220.26,-1109.74 ccw(c2120.52,-1010) S1.3@2261.57,-1010 ; 2220.26,-1109.74 ccw(c2120.52,-1010) S1.3@2261.57,-1010
  other v1: 945.25,-1680 985.25,-1680 1025.25,-1680 1065.25,-1680 1775,-1680 1815,-1680 1855,-1680 1895,-1680 945.25,-1630 985.25,-1630 1025.25,-1630 1065.25,-1630 1775,-1630 1815,-1630 1855,-1630 1895,-1630 945.25,-1580 985.25,-1580 1065.25,-1580 1775,-1580 1815,-1580 1855,-1580 1895,-1580 945.25,-1530 985.25,-1530 1025.25,-1530 1065.25,-1530 1775,-1530 1855,-1530 1895,-1530 945.25,-1480 985.25,-1480 1025.25,-1480 1065.25,-1480 1775,-1480 1815,-1480 1855,-1480 1895,-1480

## Keep-outs
Keep-Out Layer:
  lines w5: 93.31,-1930 cw(c91.65,-1838.35) 0,-1840 0,-1550 0,-375 0,-75 cw(c77.5,-77.5) 80,0 2538.9,0 ; 93.31,-1929.13 2522.32,-1929.13 ccw(c2517.72,-1828.74) 2618.11,-1824.13 2618.11,-85 ; 2541.77,-0.02 cw(c2526.77,-90.02) 2617.88,-85

## Silkscreen, mask and mechanical layers (free items; w line width, h text height)
Top Overlay:
  text "-" at 830,-115 h60 r180
  text "-" at 950,-420 h60 r90
  text "-" at 560,-555 h60 r90
  text "-" at 1320,-680 h60 r90
  text "-" at 125,-775 h60 r270
  text "-" at 1720,-820 h60 r90
  text "-" at 815,-945 h60
  text "-" at 1180,-950 h60
  text "-" at 565,-1105 h60 r270
  text "-" at 980,-1105 h60 r270
  text "-" at 1395,-1105 h60 r270
  text "-" at 1805,-1105 h60 r270
  text "-" at 2595,-1390 h60 r90
  text "iHEBUT" at 2095,-1685 h60
  text "荣光飞鸿" at 2095,-1773.92 h60
  text "—2018" at 2325,-1775 h30
  text "安笑宇" at 2095.03,-1823.14 h35
  text "崔楠" at 2255,-1823.04 h35
  text "徐钰棋" at 2095.03,-1870 h35
  text "田夏宇" at 2255,-1869.86 h35
Top Paste:
  lines w80: 672.06,-1551.69 915.48,-1308.27 ; 1473.5,-1580 1745.24,-1308.27
Bottom Paste:
  lines w80: 145,-1325 145,-1550 435,-1840 ; 145,-1125 600,-1580 ; 445,-1840 1190.13,-1840 1400.13,-1630 ; 1025.25,-1580 1250.25,-1355 1640,-1355 1815,-1530 ; 1815,-1515 2320,-1010 ; 2315,-520 2315,-155 ; 2320,-762.76 2320,-525
Top Solder:
  lines w80: 672.06,-1551.69 915.48,-1308.27 ; 1473.5,-1580 1745.24,-1308.27
Bottom Solder:
  lines w80: 145,-1325 145,-1550 435,-1840 1190.13,-1840 1400.13,-1630 ; 145,-1125 600,-1580 ; 1025.25,-1580 1250.25,-1355 1640,-1355 1815,-1530 ; 1815,-1515 2320,-1010 ; 2315,-520 2315,-155 ; 2320,-762.76 2320,-525